# EAGLE board bathroom_fan_power_supply_bak (EAGLE 9.6.2)
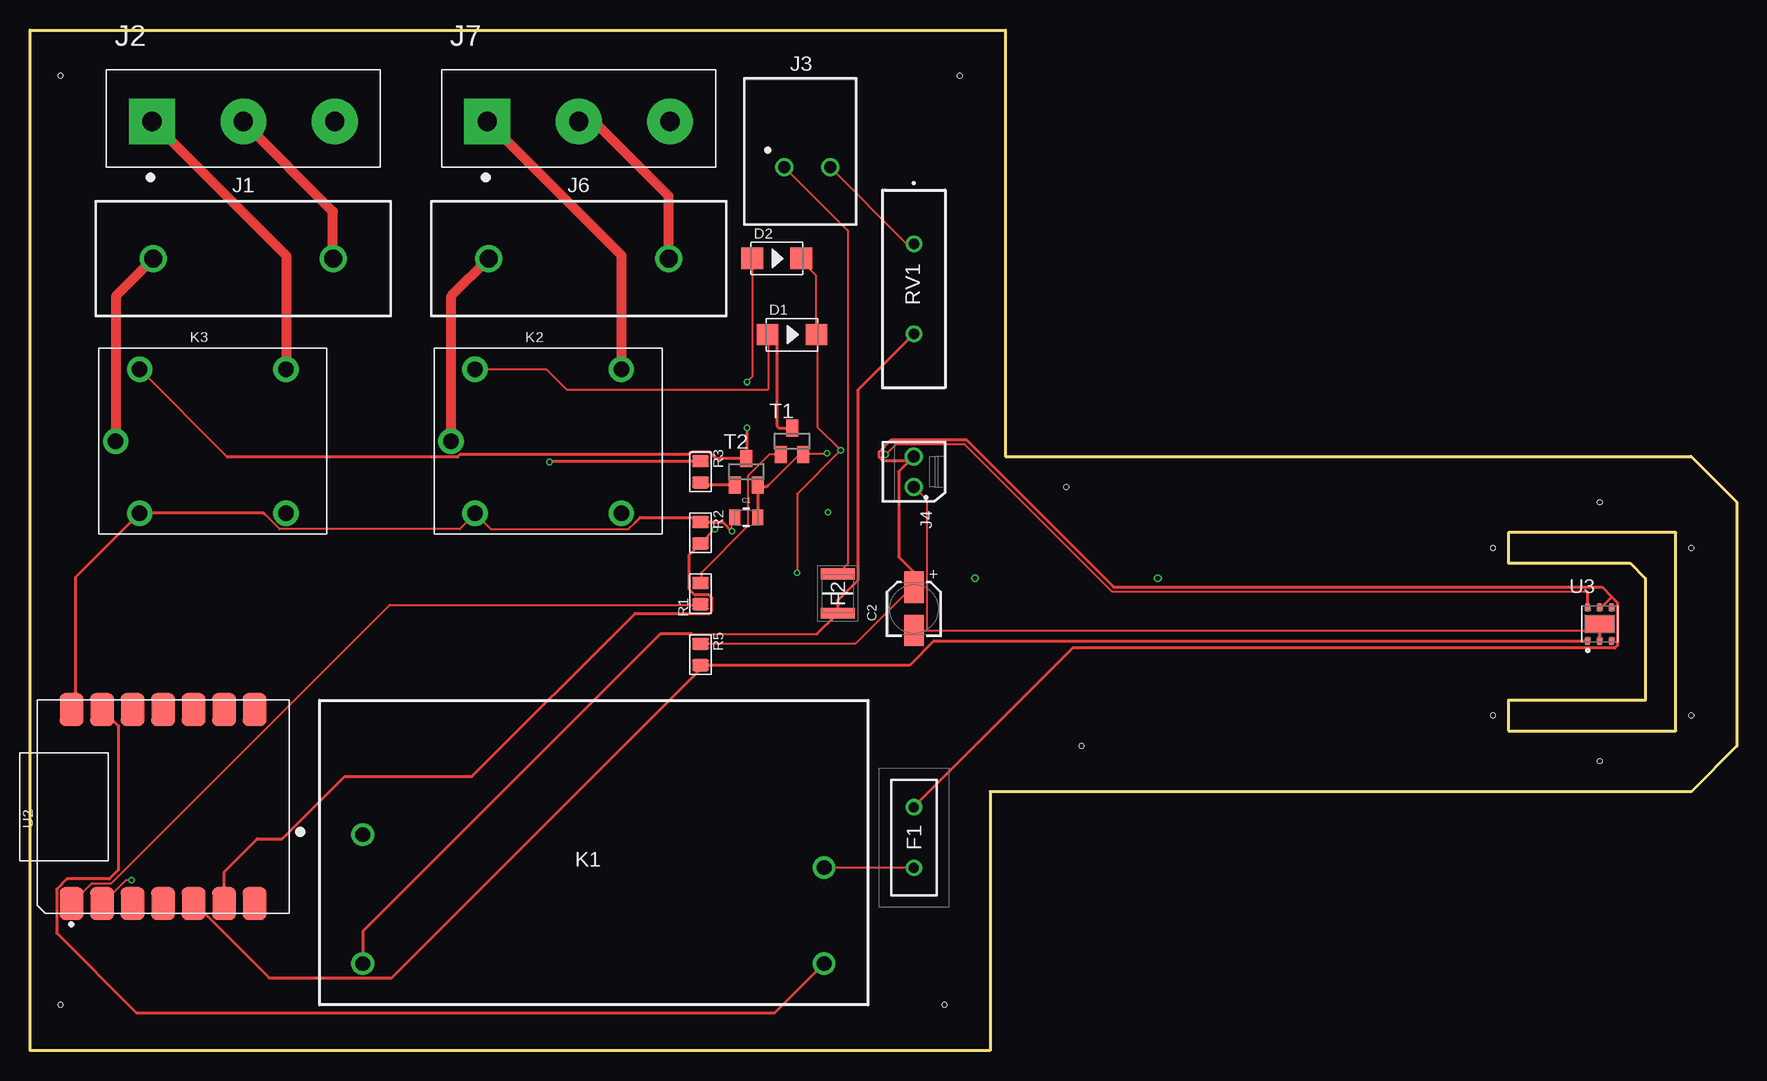
[diagram p0: board, top side]
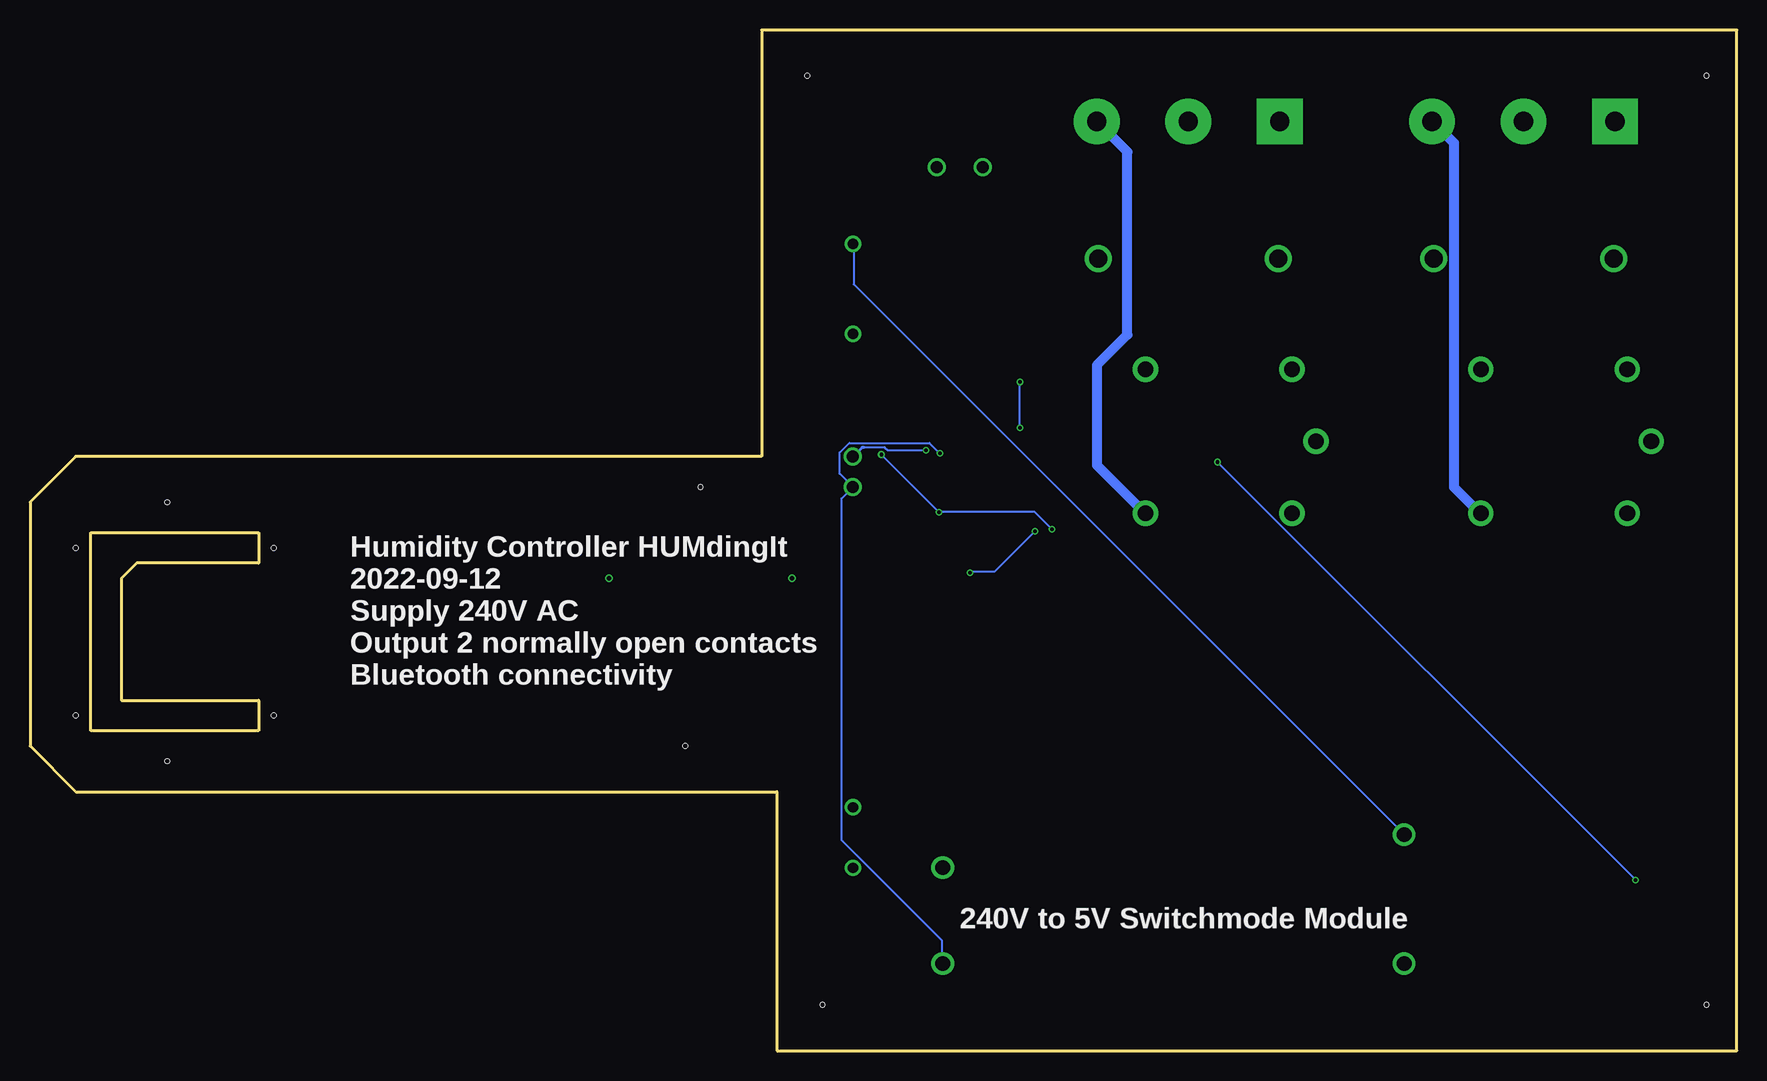
[diagram p1: board, bottom side, seen from below]

Size 142.24 x 85.09 mm. Coordinates in mm from the lower left corner, seen from the top.
Outline: 0,0 0,85.09 81.28,85.09 81.28,49.53 138.43,49.53 142.24,45.72 142.24,25.4 138.43,21.59 80.01,21.59 80.01,0 0,0
Copper layers (1*16): Top 0.035mm / dielectric 1.5mm / Bottom 0.035mm
Design rules "SparkFun-2-Layer-Minimum-JLCPCB": minimum track width 5mil, minimum drill 0.3mm, track to track 5mil, track to pad 5mil, pad to pad 5mil, via to via 5mil, smd to smd 5mil, copper to edge 7mil, drill to drill 7mil, minimum pad ring 5mil, minimum via ring 5mil, stop-mask expansion 2.5mil, vias tented up to drill 25mil, thermal gap 10mil
Net classes: 1 Power: width 0.007 mm
Holes 0.38 mm at 2.54,81.28 77.47,81.28 2.54,3.81 76.2,3.81 121.92,41.91 121.92,27.94 138.43,41.91 138.43,27.94 130.81,45.72 130.81,24.13 86.36,46.99 87.63,25.4
Milling: 9 lines

## Footprints (pad centres in the part's own frame; a part is rotated, then mirrored left to right if it is on the bottom)
WCAP-CSGP_0805_H0.8_R = smd 0.9 x 1.3: 1 -0.95,0; 2 0.95,0
WCAP-AS5H_4X5.5(DXL) = smd 2.6 x 1.6: 1 1.8,0; 2 -1.8,0
DO-214AC = smd 1.8 x 1.77: 1 -2.042,0; 2 2.042,0
LVR025K = drill 0.84 pad 1.365: 1 0,0; 2 5.05,0
FUSC3226X85N = smd 0.88 x 2.81: 1 -1.635,0; 2 1.635,0
696106003002 = drill 1.5: 1 -7.5,0; 2 7.5,0
TERMINALBLOCK_PLUGGABLE-3-7.62MM = drill 1.6 pad 3.81 square: 1 -7.62,0 | drill 1.6 pad 3.81: 2 0,0; 3 7.62,0
691418320002 = drill 1: 1 -1.905,0; 2 1.905,0
66100211622 = drill 1: 1 1.27,0; 2 -1.27,0
IRM-05-3.3_1 = drill 1.24 pad 1.89: 1 3.6,14.2; 2 3.6,3.45; 3 42.05,3.45; 4 42.05,11.45
REY5-19.0X15.0X15.0MM = drill 1.3 pad 2.1: 1 -8.1,0; 2 -6.1,-6; 3 -6.1,6; 4 6.1,-6; 5 6.1,6
R0805 = smd 1.397 x 1.016: 1 0,0.889; 2 0,-0.889
MOV-14D(5.2MM-T) = drill 0.9 pad 1.4: 1 -3.75,0; 2 3.75,0
SOT23 = smd 1 x 1.4: 1 -0.95,-1.1; 2 0.95,-1.1; 3 0,1.1
MOUDLE14P-2.54-21X17.8MM = smd 2.75 x 2: 1 0.835,18.12; 2 0.835,15.58; 3 0.835,13.04; 4 0.835,10.5; 5 0.835,7.96; 6 0.835,5.42; 7 0.835,2.88; 8 17,2.88; 9 17,5.42; 10 17,7.96; 11 17,10.5; 12 17,13.04; 13 17,15.58; 14 17,18.12
6-TDFN = smd 0.43 x 0.71: 1 -1,-1.4; 2 0,-1.4; 3 1,-1.4; 4 1,1.4; 5 0,1.4; 6 -1,1.4 | smd 2.4 x 1.5: 7 0,0

## Placement (x,y rotation side)
C1  100nF  [WCAP-CSGP_0805_H0.8_R]  59.69,44.45 0 top
C2  10uF  [WCAP-AS5H_4X5.5(DXL)]  73.66,36.83 90 top
D1  1N4007  [DO-214AC]  63.5,59.69 0 top
D2  1N4007  [DO-214AC]  62.23,66.04 0 top
DRILEGEND  [DRILEGEND]  -1.03,-3.81 0 top  (outside the outline)
F1  LVR025K  [LVR025K]  73.66,15.24 90 top
F2  MF-USMF110-2  [FUSC3226X85N]  67.31,38.1 270 top
J1  696106003002  [696106003002]  17.78,66.04 0 top
J2  691311400103  [TERMINALBLOCK_PLUGGABLE-3-7.62MM]  17.78,77.47 0 top
J3  691418320002  [691418320002]  64.77,73.66 0 top
J4  66100211622  [66100211622]  73.66,48.26 270 top
J6  696106003002  [696106003002]  45.72,66.04 0 top
J7  691311400103  [TERMINALBLOCK_PLUGGABLE-3-7.62MM]  45.72,77.47 0 top
K1  IRM-05-3.3  [IRM-05-3.3_1]  24.13,3.81 0 top
K2  HLS8L-DC3V-S-C  [REY5-19.0X15.0X15.0MM]  43.18,50.8 0 top
K3  HLS8L-DC3V-S-C  [REY5-19.0X15.0X15.0MM]  15.24,50.8 0 top
R1  5.6k  [R0805]  55.88,38.1 180 top
R2  1K  [R0805]  55.88,43.18 0 top
R3  5.6k  [R0805]  55.88,48.26 0 top
R5  1K  [R0805]  55.88,33.02 0 top
RV1  MOV-14D431K  [MOV-14D(5.2MM-T)]  73.66,63.5 270 top
T1  BC848  [SOT23]  63.5,50.8 0 top
T2  BC848  [SOT23]  59.69,48.26 0 top
U2  [MOUDLE14P-2.54-21X17.8MM]  21.59,11.43 90 top
U3  SHT21  [6-TDFN]  130.81,35.56 0 top

## Library data of the parts
C1 = Wurth_Capacitors_WCAP-CSGP; CERAMIC-TYPE: X7R Class II; DATASHEET-URL: https://www.we-online.com/redexpert/spec/885012207016?ae; DF: 5%; HEIGHT: 0.8mm; MOUNT: SMT; OPERATING-TEMPERATURE: -55 up to +125 °C; PART-NUMBER: 885012207016; QMIN: -; RISO: 5GOhm; SIZE: 0805; TECHNICAL-REFERENCE: X7R0805104K010DFCT10000; VR: 10V(DC)
C2 = Wurth_Capacitors_WCAP-AS5H; DATASHEET-URL: https://www.we-online.com/redexpert/spec/865230340001?ae; DF: 22%; DIAMETER: 4mm; ENDURANCE: 5000h; HEIGHT: 5.5mm; I-LEAK: 3uA; I-RIPPLE: 17mA; OPERATING-TEMPERATURE: -40 °C up to +105 °C; PART-NUMBER: 865230340001; TECHNICAL-REFERENCE: ASDB055100M016DVCTAE000; VR: 16V(DC)
D1 D2 = OPL_Discrete_Semiconductor; MPN: 1N4007
DRILEGEND = drilegend
F1 = LVR025K; ARROW_PART_NUMBER: LVR025K; ARROW_PRICE-STOCK: https://www.arrow.com/en/products/lvr025k/littelfuse?region=europe; DESCRIPTION: Fuse,resettable,PolySwitch,thermal and overcurrent protection,PCB mount,240Vac,250mA; HEIGHT: 18.8mm; MANUFACTURER_NAME: LITTELFUSE; MANUFACTURER_PART_NUMBER: LVR025K; MOUSER_PART_NUMBER: 650-LVR025K; MOUSER_PRICE-STOCK: https://www.mouser.co.uk/ProductDetail/Littelfuse/LVR025K?qs=UrbseFuNL0k%252BoDJit06JJg%3D%3D
F2 = MF-USMF110-2; ARROW_PART_NUMBER: MF-USMF110-2; ARROW_PRICE-STOCK: https://www.arrow.com/en/products/mf-usmf110-2/bourns; DESCRIPTION: Bourns 1.1A Surface Mount Resettable Fuse, 6 V; HEIGHT: 0.85mm; MANUFACTURER_NAME: Bourns; MANUFACTURER_PART_NUMBER: MF-USMF110-2; MOUSER_PART_NUMBER: 652-MF-USMF110-2; MOUSER_PRICE-STOCK: https://www.mouser.co.uk/ProductDetail/Bourns/MF-USMF110-2?qs=9FzDyaD7ZFDRIi%252Bgh%252BHt3w%3D%3D
J1 J6 = Wurth_Connectors_WR-FSH; DATASHEET-URL: https://www.we-online.com/catalog/datasheet/696106003002.pdf; IR-UL: 20A; IR-VDE: 6.3A; MATES: 696122003001; PART-NUMBER: 696106003002
J2 J7 = Terminal Blocks; CREATED_BY: PCBLayout.com; DIGIKEY_PART_NO: 732-2824-ND; MANUFACTURER: WURTH ELEKTRONIK; MPN: 691311400103
J3 = Wurth_Connectors_WR-TBL Spring Clamp; DATASHEET-URL: https://www.we-online.com/catalog/datasheet/691418320002.pdf; IR-UL: 4A; IR-VDE: 4A; MOUNT: THT; PART-NUMBER: 691418320002; PINS: 2; PITCH: 3.81mm; TYPE: 45°; WIRE: 16 to 30 (AWG) 1.31 to 0.0509 (mm²); WORKING-VOLTAGE-UL: 300V (AC); WORKING-VOLTAGE-VDE: 250V (AC)
J4 = Wurth_Connectors_WR-WTB; CONTACT-RESISTANCE: 20mOhm; DATASHEET-URL: https://www.we-online.com/catalog/datasheet/66100211622.pdf; GENDER: Male; IR: 3A; L: 4.78mm; MOUNT: THT; PACKAGING: Box; PART-NUMBER: 66100211622; PCB-CABLE-PANEL: PCB; PINS: 2; PITCH: 2.54mm; TOL-R: max.; TYPE: Vertical; WORKING-VOLTAGE: 50V(AC)
K1 = IRM-05-3.3; ARROW_PART_NUMBER: IRM-05-3.3; ARROW_PRICE-STOCK: https://www.arrow.com/en/products/irm-05-3.3/mean-well-enterprises?region=nac; DESCRIPTION: AC/DC Power Modules 3.3V 1.25A 4.125W 85-264Vin Encap PS; HEIGHT: mm; MANUFACTURER_NAME: Mean Well; MANUFACTURER_PART_NUMBER: IRM-05-3.3; MOUSER_PART_NUMBER: 709-IRM05-3.3; MOUSER_PRICE-STOCK: https://www.mouser.co.uk/ProductDetail/MEAN-WELL/IRM-05-3.3?qs=WkdRfq4wf1MOEinwvhZEjA%3D%3D
K2 K3 = OPL_Relay
R1-R3 R5 = OPL_Resistor; MPN: RC0805JR-071KL
RV1 = MOV-14D431K; ARROW_PART_NUMBER: MOV-14D431K; ARROW_PRICE-STOCK: https://www.arrow.com/en/products/mov-14d431k/bourns; DESCRIPTION: Varistor;Metal Oxide;14 mm;430V;10% Bourns MOV-14D Series Metal Oxide Varistor 460pF 50A 710V; HEIGHT: mm; MANUFACTURER_NAME: Bourns; MANUFACTURER_PART_NUMBER: MOV-14D431K; MOUSER_PART_NUMBER: 652-MOV-14D431K; MOUSER_PRICE-STOCK: https://www.mouser.co.uk/ProductDetail/Bourns/MOV-14D431K?qs=CQ3B1E%252BbPs0oqNHNiUHWVg%3D%3D
T1 T2 = transistor-neu-to92
U2 = XIAO nRF52840
U3 = Sensor; CREATED_BY: PCBLayout.com; DIGIKEY_PART_NUMBER: 1649-1005-1-ND; MANUFACTURER: Sensirion AG; MPN: SHT21; PACKAGE: 6-TDFN

## Nets
+5V: C1.1 C2.1 D1.2 D2.2 F1.2 J4.2 K2.2 K3.2 R2.1 R5.1 U2.14 U3.5
FAN_SPEED_1: R1.1 U2.1
FAN_SPEED_2: R3.1 U2.2
GND: C1.2 C2.2 J4.1 K1.3 T1.2 T2.2 U2.13 U3.2 U3.7
HIGHCURRENT1 [Power]: J1.1 K3.1
N$1: F2.2 K1.2 RV1.2
N$2: F2.1 J3.1
N$3: F1.1 K1.4
N$4 [Power]: J6.1 K2.1
N$6: J3.2 K1.1 RV1.1
N$7 [Power]: J6.2 J7.2
N$9: R1.2 T1.1
N$11 [Power]: J7.1 K2.5
N$12 [Power]: J7.3 K2.4
N$14: D2.1 K3.3 T2.3
N$15: R3.2 T2.1
N$16 [Power]: J2.1 K3.5
N$17 [Power]: J2.3 K3.4
N$18 [Power]: J1.2 J2.2
N$19: D1.1 K2.3 T1.3
SCL: R2.2 U2.6 U3.6
SDA: R5.2 U2.5 U3.1

## Tracks (layer width: path | path; a pad name or v marks a point on that pad's centre or on a via)
+5V  (via drill 0.3)
  Top 0.178: C1.1 58.5,44.45 v58.5,43.29 | 50.41,44.01 49.87,43.47 38.41,43.47 37.16,44.72 | 19.56,44.72 20.8,43.47 35.83,43.47 37.07,44.72 | 65.52,59.74 65.52,64.63 64.28,65.88 | 55.92,33.96 68.81,33.96 73.52,38.67 | 65.61,59.65 65.61,52.01 v67.56,50.05 63.92,46.41 v63.92,39.83
  Top 0.254: 50.41,44.01 50.85,44.45 55.5,44.45 R2.1 57.72,44.07 v58.5,43.29 | 65.52,59.74 65.52,59.71 D1.2 65.57,59.69 65.61,59.65 | 37.07,44.72 37.08,44.73 K2.2 37.16,44.72 | R5.1 55.92,33.95 55.92,33.96 | D2.2 64.28,65.88 | 73.52,38.67 73.56,38.63 C2.1 73.66,39.9 72.39,41.17 72.39,48.26 J4.2 73.29,49.16 71.08,49.16 70.77,49.48 70.77,49.91 71.78,50.93 78.01,50.93 90.3,38.63 131,38.63 131.81,37.83 | U2.14 3.81,28.77 3.81,39.47 K3.2 19.48,44.8 19.56,44.72 | F1.2 73.66,20.32 86.89,33.55 132.07,33.55 132.28,33.76 132.28,37.36 131.81,37.83 | 131.81,37.83 130.94,36.96 U3.5
  Bottom 0.178: v58.5,43.29 61.87,39.92 63.92,39.92 v63.92,39.83 | v67.56,50.05 70.76,50.05 71,50.29 72.75,50.29
  Bottom 0.254: 72.75,50.29 72.9,50.29 J4.2
FAN_SPEED_1
  Top 0.178: R1.1 55.83,37.16 29.96,37.16 6.76,13.96 5.16,13.96 U2.1
FAN_SPEED_2  (via drill 0.3)
  Top 0.178: v8.45,14.22 8,14.22 6.04,12.27 U2.2
  Top 0.254: v43.29,49.07 43.37,49.15 R3.1
  Bottom 0.178: v8.45,14.22 v43.29,49.07
GND  (via drill 0.3)
  Top 0.178: 130.86,34.23 130.86,35.03 74.77,35.03 | 73.7,35.03 74.77,35.03 | 64.54,49.78 v66.41,49.78 | 64.1,49.7 61.52,47.12 | 74.77,35.03 74.77,45.88 J4.1
  Top 0.254: T2.2 60.64,46.99 | 60.64,46.99 C1.2 | 61.52,47.12 61.39,46.99 60.64,46.99 | 130.86,34.23 130.81,34.28 U3.7 U3.2 | 64.54,49.78 64.53,49.78 T1.2 64.1,49.7 | C2.2 73.69,35.03 73.7,35.03 | U2.13 7.37,27.07 7.37,15.06 6.61,14.3 3.06,14.3 2.22,13.45 2.22,9.81 8.86,3.16 62.08,3.16 K1.3
  Bottom 0.178: v66.41,49.78 67.3,50.67 73.97,50.67 74.77,49.87 74.77,48.09 J4.1 74.61,46.04 74.61,17.54 66.23,9.16 66.23,7.31 K1.3
HIGHCURRENT1
  Top 0.254: K3.1 7.19,50.85 7.2,50.85 | 7.2,62.94 7.2,62.96
  Top 0.813: 7.2,50.85 7.2,62.94 | 7.2,62.96 J1.1
N$1
  Top 0.178: 55.18,34.73 65.58,34.73
  Top 0.254: RV1.2 68.97,55.06 68.97,39.19 67.31,37.53 F2.2 67.21,36.36 65.58,34.73 | 55.18,34.73 52.51,34.73 27.73,9.95 K1.2
N$2
  Top 0.178: J3.1 68.16,68.37 68.16,40.58 F2.1
N$3
  Top 0.178: 66.23,15.29 73.61,15.29 F1.1
  Top 0.254: K1.4 66.21,15.29 66.23,15.29
N$4
  Top 0.254: K2.1 35.12,50.84 35.12,50.85 | J6.1 38.14,65.96
  Top 0.813: 35.12,50.85 35.12,62.94 38.14,65.96
N$6
  Top 0.178: RV1.1 73.61,67.3 73.04,67.3 J3.2
  Bottom 0.178: RV1.1 73.61,67.2 73.61,63.89 K1.1
N$7
  Top 0.813: J6.2 53.22,71.24 46.99,77.47 J7.2
N$8  (via drill 0.38)
  other vias: 93.98,39.37
N$9
  Top 0.178: 62.32,49.7 61.61,49.7 59.83,47.92 59.83,43.74 55.92,39.83 55.92,39.03 R1.2
  Top 0.254: T1.1 62.32,49.7
N$10  (via drill 0.38)
  other vias: 78.74,39.37
N$11
  Top 0.254: 49.25,66.32 49.28,66.29
  Top 0.813: J7.1 49.25,66.32 | 49.28,66.29 K2.5
N$12
  Bottom 0.254: 49.33,44.8 K2.4
  Bottom 0.813: 49.33,44.8 53.34,48.81 53.34,57.15 50.8,59.69 50.8,74.93 J7.3
N$14  (via drill 0.3)
  Top 0.178: 59.74,49.53 59.74,49.43 | 60.19,65.96 60.19,56.19 v59.74,55.74 | 16.46,49.48 K3.3
  Top 0.254: 16.46,49.48 35.61,49.48 35.81,49.69 54.93,49.69 55.15,49.91 56.61,49.91 57.16,49.36 T2.3 59.69,49.38 59.74,49.43 | D2.1 60.19,65.97 60.19,65.96 | v59.74,51.92 59.74,49.53
  Bottom 0.178: v59.74,51.92 v59.74,55.74
N$15
  Top 0.254: T2.1 56.09,47.16 R3.2
N$16
  Top 0.813: J2.1 21.34,66.29 K3.5
N$17
  Bottom 0.254: 21.42,44.8 K3.4 | 25.38,77.47 J2.3
  Bottom 0.813: 21.42,44.8 23.57,46.95 23.57,75.67 25.38,77.47
N$18
  Top 0.178: 17.78,77.43 J2.2
  Top 0.254: J1.2 25.26,66.04 25.25,66.05
  Top 0.813: 25.25,66.05 25.25,69.96 17.78,77.43
N$19
  Top 0.178: K2.3 43.03,56.8 44.72,55.12 61.52,55.12 61.52,59.63 D1.1
  Top 0.254: D1.1 62.23,59.69 62.23,53.34 62.23,53.17 62.23,52.07 62.4,51.9 T1.3
SCL  (via drill 0.3)
  Top 0.178: 129.79,38.25 90.19,38.25 77.86,50.58 72.19,50.58 v71.3,49.7
  Top 0.254: v57.07,43.47 55.89,42.29 R2.2 54.93,41.34 54.93,40.96 54.93,40.64 54.93,38.45 55.41,37.97 56.61,37.97 56.83,37.75 56.83,36.67 56.61,36.45 50.42,36.45 36.83,22.86 26.21,22.86 21.01,17.65 18.92,17.65 16.17,14.9 U2.6 | U3.6 129.79,36.98 129.79,38.25
  Bottom 0.178: v57.07,43.47 58.5,44.9 v66.5,44.9 v71.3,49.7
SDA
  Top 0.254: U3.1 75.32,34.16 73.29,32.13 R5.2 55.88,31.8 30.14,6.06 19.93,6.06 13.73,12.27 U2.5

## Text on the board
bPlace: Humidity Controller HUMdingIt / 2022-09-12 / Supply 240V AC / Output 2 normally open contacts / Bluetooth connectivity | 240V to 5V Switchmode Module
DrillLegend: LAYER-STACK
DrillLegend_01-16: 01-16